# EAGLE board Schematic_Design_File (EAGLE 9.6.2)
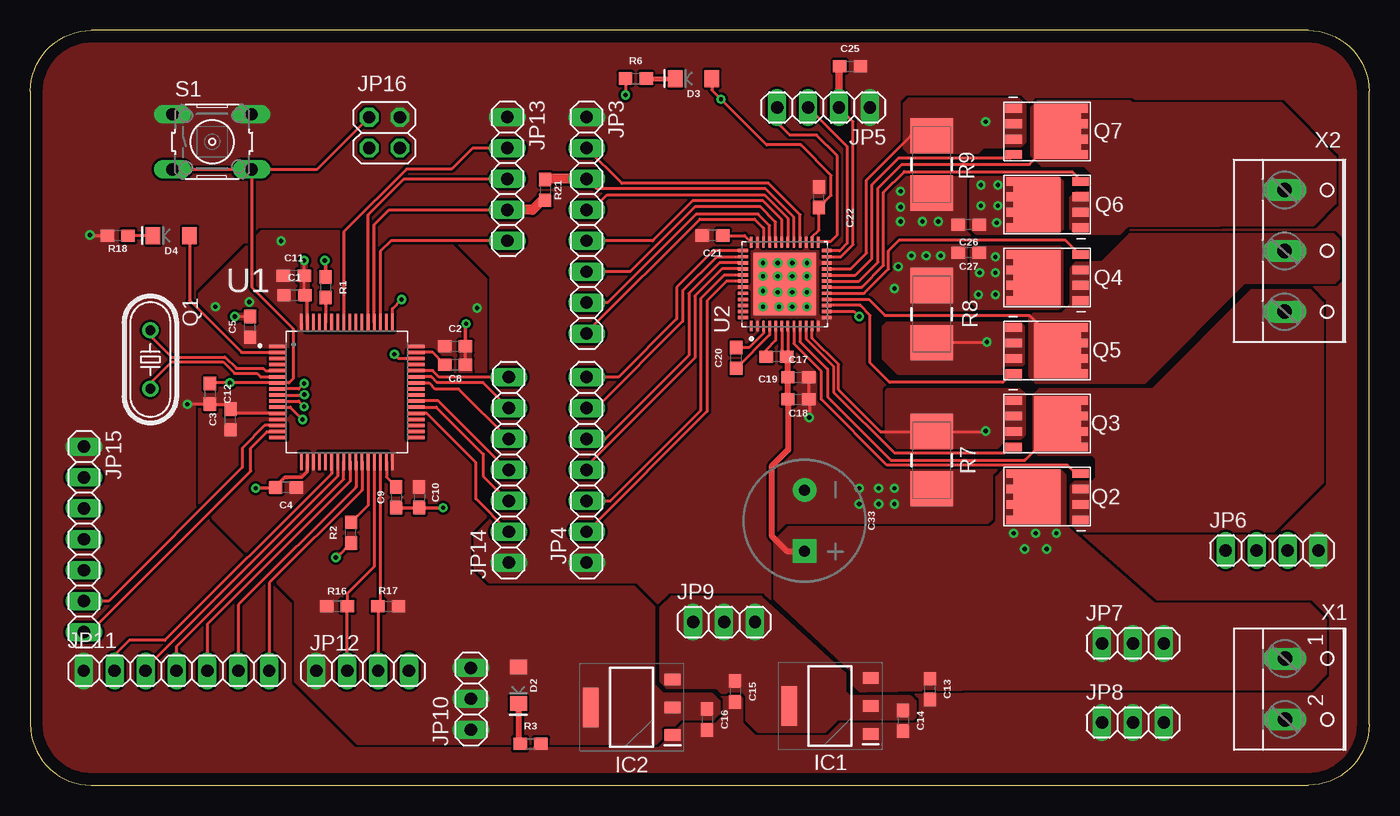
[diagram p0: board, top side]
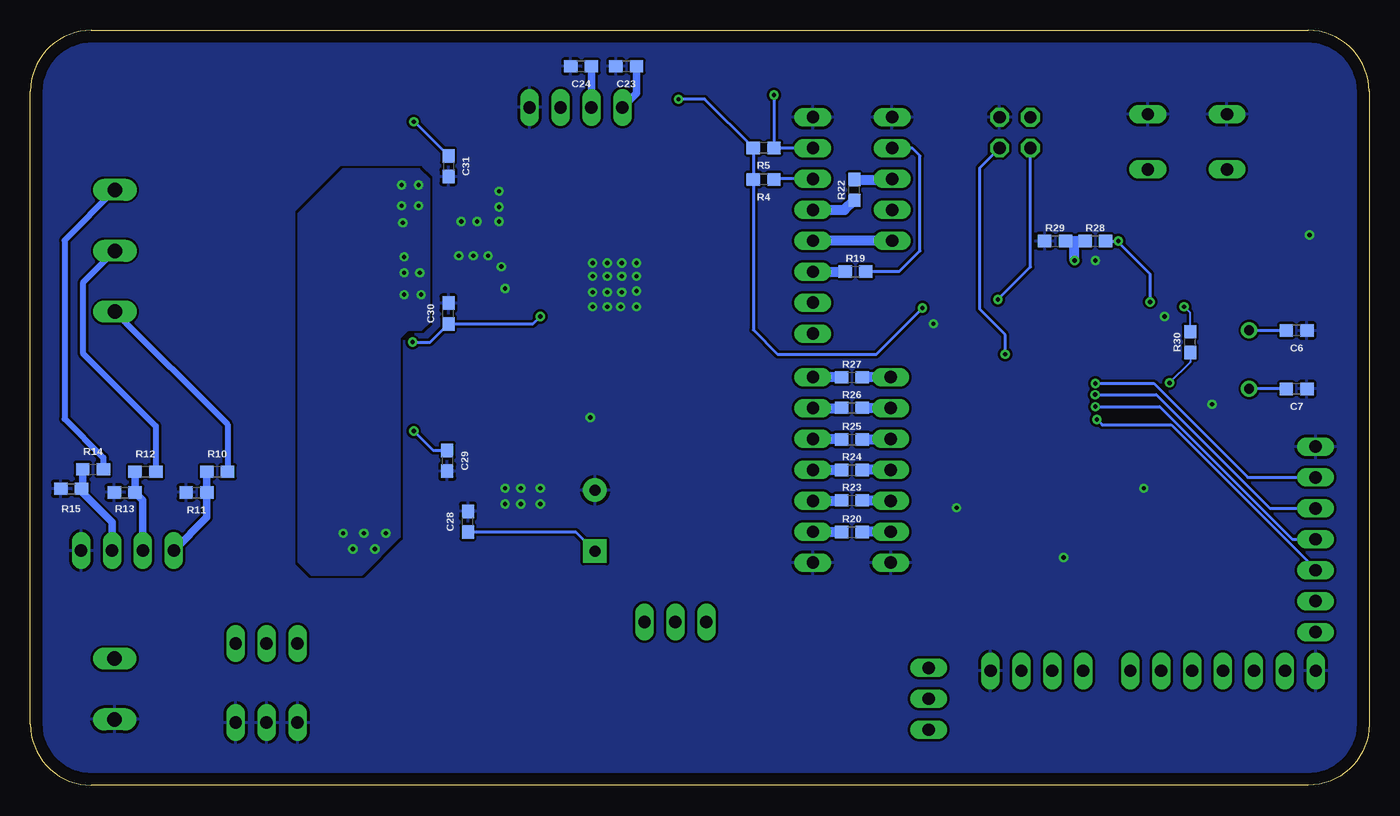
[diagram p1: board, bottom side, seen from below]

Size 110 x 62 mm. Coordinates in mm from the lower left corner, seen from the top.
Outline: 5,0 105,0 arc90 110,5 110,57 arc90 105,62 5,62 arc90 0,57 0,5 arc90 5,0
Copper layers (1*16): Top 0.035mm / dielectric 1.5mm / Bottom 0.035mm
Design rules "default *": minimum track width 6mil, minimum drill 0.35mm, track to track 6mil, track to pad 6mil, pad to pad 6mil, via to via 6mil, smd to smd 6mil, copper to edge 40mil, drill to drill 6mil, minimum pad ring 10mil, minimum via ring 8mil, stop-mask expansion 4mil, vias tented up to drill 0mil, thermal gap 10mil

## Footprints (pad centres in the part's own frame; a part is rotated, then mirrored left to right if it is on the bottom)
0603 = smd 1.1 x 1: 1 -0.85,0; 2 0.85,0
CPOL-RADIAL-5MM-10MM-NS = drill 0.9 pad 1.93 square: + 2.5,0 | drill 0.9 pad 1.93: - -2.5,0
LED-1206 = smd 1.2 x 1.4: A -1.5,0; C 1.5,0
SOT229P700X180-4N = smd 1.3 x 0.95: 1 -3.35,2.29; 2 -3.35,0; 3 -3.35,-2.29 | smd 1.3 x 3.25: 4 3.35,0
1X08 = drill 1.016 long: 1 -8.89,0; 2 -6.35,0; 3 -3.81,0; 4 -1.27,0; 5 1.27,0; 6 3.81,0; 7 6.35,0; 8 8.89,0
1X07 = drill 1.016 long: 1 -7.62,0; 2 -5.08,0; 3 -2.54,0; 4 0,0; 5 2.54,0; 6 5.08,0; 7 7.62,0
1X04 = drill 1.016 long: 1 -3.81,0; 2 -1.27,0; 3 1.27,0; 4 3.81,0
1X03 = drill 1.016 long: 1 -2.54,0; 2 0,0; 3 2.54,0
1X05 = drill 1.016 long: 1 -5.08,0; 2 -2.54,0; 3 0,0; 4 2.54,0; 5 5.08,0
2X02 = drill 1.016 octagon: 1 -1.27,-1.27; 2 -1.27,1.27; 3 1.27,-1.27; 4 1.27,1.27
HC49/S = drill 0.813: 1 -2.413,0; 2 2.413,0
CSD18540Q5BT = smd 1.372 x 0.71: 1 2.907,-1.905; 2 2.907,-0.635; 3 2.907,0.635; 4 2.907,1.905 | smd 0.59 x 0.71: 5 -2.907,1.905; 6 -2.907,0.635; 7 -2.907,-0.635; 8 -2.907,-1.905 | smd 3.85 x 4.52: 9 -0.687,0
WRIS_PSMC_2512_6.3X3.1X0.58X2.2(LXWXHXPW) = smd 2.9 x 3.5: 1 -2.35,0; 2 2.35,0
B3F-10XX = drill 1.016 long: 1 -3.251,2.261; 2 3.251,2.261; 3 -3.251,-2.261; 4 3.251,-2.261
QFP50P1200X1200X160-64N = smd 1.47 x 0.28: 1 -5.67,3.75; 2 -5.67,3.25; 3 -5.67,2.75; 4 -5.67,2.25; 5 -5.67,1.75; 6 -5.67,1.25; 7 -5.67,0.75; 8 -5.67,0.25; 9 -5.67,-0.25; 10 -5.67,-0.75; 11 -5.67,-1.25; 12 -5.67,-1.75; 13 -5.67,-2.25; 14 -5.67,-2.75; 15 -5.67,-3.25; 16 -5.67,-3.75; 33 5.67,-3.75; 34 5.67,-3.25; 35 5.67,-2.75; 36 5.67,-2.25; 37 5.67,-1.75; 38 5.67,-1.25; 39 5.67,-0.75; 40 5.67,-0.25; 41 5.67,0.25; 42 5.67,0.75; 43 5.67,1.25; 44 5.67,1.75; 45 5.67,2.25; 46 5.67,2.75; 47 5.67,3.25; 48 5.67,3.75 | smd 0.28 x 1.47: 17 -3.75,-5.67; 18 -3.25,-5.67; 19 -2.75,-5.67; 20 -2.25,-5.67; 21 -1.75,-5.67; 22 -1.25,-5.67; 23 -0.75,-5.67; 24 -0.25,-5.67; 25 0.25,-5.67; 26 0.75,-5.67; 27 1.25,-5.67; 28 1.75,-5.67; 29 2.25,-5.67; 30 2.75,-5.67; 31 3.25,-5.67; 32 3.75,-5.67; 49 3.75,5.67; 50 3.25,5.67; 51 2.75,5.67; 52 2.25,5.67; 53 1.75,5.67; 54 1.25,5.67; 55 0.75,5.67; 56 0.25,5.67; 57 -0.25,5.67; 58 -0.75,5.67; 59 -1.25,5.67; 60 -1.75,5.67; 61 -2.25,5.67; 62 -2.75,5.67; 63 -3.25,5.67; 64 -3.75,5.67
QFN50P700X700X100-49N = smd 0.86 x 0.26: 1 -3.435,2.75; 2 -3.435,2.25; 3 -3.435,1.75; 4 -3.435,1.25; 5 -3.435,0.75; 6 -3.435,0.25; 7 -3.435,-0.25; 8 -3.435,-0.75; 9 -3.435,-1.25; 10 -3.435,-1.75; 11 -3.435,-2.25; 12 -3.435,-2.75; 25 3.435,-2.75; 26 3.435,-2.25; 27 3.435,-1.75; 28 3.435,-1.25; 29 3.435,-0.75; 30 3.435,-0.25; 31 3.435,0.25; 32 3.435,0.75; 33 3.435,1.25; 34 3.435,1.75; 35 3.435,2.25; 36 3.435,2.75 | smd 0.26 x 0.86: 13 -2.75,-3.435; 14 -2.25,-3.435; 15 -1.75,-3.435; 16 -1.25,-3.435; 17 -0.75,-3.435; 18 -0.25,-3.435; 19 0.25,-3.435; 20 0.75,-3.435; 21 1.25,-3.435; 22 1.75,-3.435; 23 2.25,-3.435; 24 2.75,-3.435; 37 2.75,3.435; 38 2.25,3.435; 39 1.75,3.435; 40 1.25,3.435; 41 0.75,3.435; 42 0.25,3.435; 43 -0.25,3.435; 44 -0.75,3.435; 45 -1.25,3.435; 46 -1.75,3.435; 47 -2.25,3.435; 48 -2.75,3.435 | smd 5.15 x 5.15: 49 0,0
W237-102 = drill 1.194 long: 1 -2.5,-1.27; 2 2.5,-1.27
W237-103 = drill 1.194 long: 1 -5,-1.29; 2 0,-1.29; 3 5,-1.29

## Placement (x,y rotation side)
C1  10uf  [0603]  21.7,40.25 0 top
C2  0.1uf  [0603]  34.9,36.05 0 top
C3  0.1uf  [0603]  16.45,30.05 90 top
C4  0.1uf  [0603]  21,24.45 180 top
C5  0.1uf  [0603]  18.05,37.65 90 top
C6  [0603]  5.95,37.35 180 bottom
C7  [0603]  5.95,32.55 180 bottom
C8  0.1uf  [0603]  34.9,34.55 0 top
C9  0.1uf  [0603]  30.05,23.65 270 top
C10  0.1uf  [0603]  31.95,23.65 270 top
C11  0.1uf  [0603]  21.65,41.85 0 top
C12  0.1uf  [0603]  14.75,32.15 270 top
C13  0.1uf  [0603]  73.9,7.9 270 top
C14  0.1uf  [0603]  71.7,5.3 270 top
C15  0.1uf  [0603]  57.9,7.7 270 top
C16  0.1uf  [0603]  55.6,5.4 270 top
C17  4.7uf  [0603]  63.1,33.5 0 top
C18  0.1uf  [0603]  63.1,31.7 0 top
C19  1uf  [0603]  61.3,35.2 180 top
C20  47nf  [0603]  58,35.1 90 top
C21  1uf  [0603]  56.05,45.15 180 top
C22  0.1uf  [0603]  64.8,48.3 90 top
C23  2200pf  [0603]  61.05,59.05 180 bottom
C24  2200pf  [0603]  64.75,59.05 180 bottom
C25  2200pf  [0603]  67.35,59.05 0 top
C26  0.1uf  [0603]  77.1,46.05 180 top
C27  0.1uf  [0603]  77.1,43.75 180 top
C28  0.1uf  [0603]  74.05,21.65 90 bottom
C29  1000pf  [0603]  75.75,26.65 270 bottom
C30  1000pf  [0603]  75.65,38.75 90 bottom
C31  1000pf  [0603]  75.65,50.85 270 bottom
C33  220uf-25V  [CPOL-RADIAL-5MM-10MM-NS]  63.61,21.73 270 top
D2  [LED-1206]  40.1,8.2 270 top
D3  [LED-1206]  54.5,58.05 180 top
D4  [LED-1206]  11.58,45.15 180 top
IC1  AMS1117  [SOT229P700X180-4N]  65.7,6.5 180 top
IC2  AMS1117  [SOT229P700X180-4N]  49.4,6.4 180 top
JP3  [1X08]  45.7,45.99 270 top
JP4  [1X07]  45.7,25.9 90 top
JP5  [1X04]  65.17,55.67 180 top
JP6  [1X04]  102.03,19.28 0 top
JP7  [1X03]  90.6,11.65 0 top
JP8  [1X03]  90.6,5.15 0 top
JP9  [1X03]  57,13.4 0 top
JP10  [1X03]  36.2,7.1 90 top
JP11  [1X07]  12,9.4 0 top
JP12  [1X04]  27.3,9.4 0 top
JP13  [1X05]  39.2,49.8 270 top
JP14  [1X07]  39.3,25.9 90 top
JP15  [1X07]  4.4,20.2 270 top
JP16  [2X02]  29.1,53.6 90 top
Q1  [HC49/S]  9.86,34.97 270 top
Q2  CSD18510Q5B  [CSD18540Q5BT]  83.4,23.7 0 top
Q3  CSD18510Q5B  [CSD18540Q5BT]  83.7,29.7 180 top
Q4  CSD18510Q5B  [CSD18540Q5BT]  83.4,41.7 0 top
Q5  CSD18510Q5B  [CSD18540Q5BT]  83.7,35.7 180 top
Q6  CSD18510Q5B  [CSD18540Q5BT]  83.4,47.7 0 top
Q7  CSD18510Q5B  [CSD18540Q5BT]  83.7,53.7 180 top
R1  10k  [0603]  24.25,40.9 270 top
R2  10k  [0603]  26.35,20.75 90 top
R3  [0603]  41.1,3.4 0 top
R4  10k  [0603]  49.75,49.75 180 bottom
R5  10k  [0603]  49.75,52.35 180 bottom
R6  [0603]  49.75,58.05 0 top
R7  R050  [WRIS_PSMC_2512_6.3X3.1X0.58X2.2(LXWXHXPW)]  74.05,26.7 90 top
R8  R050  [WRIS_PSMC_2512_6.3X3.1X0.58X2.2(LXWXHXPW)]  74.05,38.7 270 top
R9  R050  [WRIS_PSMC_2512_6.3X3.1X0.58X2.2(LXWXHXPW)]  74.05,51 90 top
R10  [0603]  94.65,25.75 0 bottom
R11  [0603]  96.35,24.05 0 bottom
R12  [0603]  100.55,25.75 0 bottom
R13  [0603]  102.25,24.05 0 bottom
R14  [0603]  104.85,25.95 0 bottom
R15  [0603]  106.65,24.35 0 bottom
R16  10k  [0603]  25.2,14.7 180 top
R17  10k  [0603]  29.4,14.7 0 top
R18  [0603]  7.18,45.14 180 top
R19  [0603]  42.2,42.2 0 bottom
R20  [0603]  42.5,20.8 0 bottom
R21  [0603]  42.3,48.9 270 top
R22  [0603]  42.3,48.9 90 bottom
R23  [0603]  42.5,23.4 0 bottom
R24  [0603]  42.5,25.9 0 bottom
R25  [0603]  42.5,28.4 0 bottom
R26  [0603]  42.5,31 0 bottom
R27  [0603]  42.5,33.5 0 bottom
R28  [0603]  22.5,44.7 0 bottom
R29  [0603]  25.8,44.7 0 bottom
R30  10k  [0603]  14.7,36.4 90 bottom
S1  [B3F-10XX]  14.93,52.85 0 top
U1  STM32F405RGT6  [QFP50P1200X1200X160-64N]  26,32.3 0 top
U2  DRV8323RSRGZR  [QFN50P700X700X100-49N]  61.99,41.16 90 top
X1  [W237-102]  104.35,7.9 270 top
X2  [W237-103]  104.35,43.9 270 top

## Library data of the parts
C1-C31 C33 = SparkFun-Capacitors
D2-D4 = SparkFun-LED
IC1 IC2 = AMS1117; DESCRIPTION: 1117; HEIGHT: 1.8mm; MANUFACTURER_NAME: Advanced Monolithic Systems; MANUFACTURER_PART_NUMBER: AMS1117
JP3-JP16 = pinhead
Q1 = crystal; OC_FARNELL: 1667008; OC_NEWARK: unknown
Q2-Q7 = CSD18510Q5B; DESCRIPTION: MOSFET 40-V, N channel NexFET power MOSFET, single SON 5 mm x 6 mm, 0.96 mOhm 8-VSON-CLIP -55 to 150; HEIGHT: 1.05mm; MANUFACTURER_NAME: Texas Instruments; MANUFACTURER_PART_NUMBER: CSD18510Q5B; MOUSER_PART_NUMBER: 595-CSD18510Q5B; MOUSER_PRICE-STOCK: https://www.mouser.co.uk/ProductDetail/Texas-Instruments/CSD18510Q5B?qs=u4fy%2FsgLU9N21MPFguzayQ%3D%3D
R1-R6 R10-R30 = SparkFun-Resistors
R7-R9 = Wurth_Resistor_WRIS-PSMC; DATASHEET-URL: https://katalog.we-online.de/pbs/datasheet/580070763001.pdf; IR: 31.62A; MOUNT: SMT; PART-NUMBER: 580070763001; PRATED: 2W; TCR: ±100ppm/ °C; TECHNICAL-REFERENCE: MC2512R002F201KAATE0000
S1 = switch-omron; MPN: B3F-1000; OC_FARNELL: 176432; OC_NEWARK: 36M3542
U1 = STM32F405RGT6s; AVAILABILITY: In Stock; CHECK_PRICES: https://www.snapeda.com/parts/STM32F405RGT6/STMicroelectronics/view-part/?ref=eda; DESCRIPTION: ARM® Cortex®-M4 STM32F4 Microcontroller IC 32-Bit Single-Core 168MHz 1MB (1M x 8) FLASH 64-LQFP (10x10); MF: STMicroelectronics; MP: STM32F405RGT6; PACKAGE: LQFP-64 STMicroelectronics; PRICE: None; PURCHASE-URL: https://www.snapeda.com/api/url_track_click_mouser/?unipart_id=105502&manufacturer=STMicroelectronics&part_name=STM32F405RGT6&search_term=None; SNAPEDA_LINK: https://www.snapeda.com/parts/STM32F405RGT6/STMicroelectronics/view-part/?ref=snap
U2 = DRV8323RSRGZR; AVAILABILITY: In Stock; CHECK_PRICES: https://www.snapeda.com/parts/DRV8323RSRGZR/Texas+Instruments/view-part/?ref=eda; DESCRIPTION: 65-V max 3-phase smart gate driver with buck regulator & current shunt amplifiers; MF: Texas Instruments; MP: DRV8323RSRGZR; PACKAGE: VQFN-48 Texas Instruments; PRICE: None; PURCHASE-URL: https://www.snapeda.com/api/url_track_click_mouser/?unipart_id=784067&manufacturer=Texas Instruments&part_name=DRV8323RSRGZR&search_term=drv8323rs; SNAPEDA_LINK: https://www.snapeda.com/parts/DRV8323RSRGZR/Texas+Instruments/view-part/?ref=snap
X1 = con-wago-500; MPN: 237-102; OC_FARNELL: unknown; OC_NEWARK: 70K9898
X2 = con-wago-500; MPN: 237-103; OC_FARNELL: unknown; OC_NEWARK: 18M7116

## Nets
+3V3: C1.1 C2.1 C3.1 C4.1 C5.1 C10.1 C11.1 C16.1 C22.1 D2.A D3.A IC2.2 IC2.4 JP10.1 JP10.2 JP10.3 JP12.1 R4.2 R5.2 R16.2 R17.2 R28.2 R30.2 U1.1 U1.13 U1.19 U1.32 U1.48 U1.64 U2.26
+5V: C14.1 C15.1 IC1.2 IC1.4 IC2.3 JP9.1 JP9.2 JP9.3
+12V: C13.1 C17.1 C18.1 C19.1 C26.1 C27.1 C28.1 C33.+ IC1.3 JP7.1 JP7.2 JP7.3 Q2.5 Q2.6 Q2.7 Q2.8 Q2.9 Q4.5 Q4.6 Q4.7 Q4.8 Q4.9 Q6.5 Q6.6 Q6.7 Q6.8 Q6.9 U2.6 U2.7 X1.1
ADC_1: JP11.2 U1.22
ADC_2: JP11.3 U1.23
ADC_3: JP11.4 U1.24
ADC_4: JP11.5 U1.25
ADC_5: JP11.6 U1.26
ADC_6: JP11.7 U1.27
BOOT0: R1.2 U1.60
BOOT1: R2.2 U1.28
CAL: JP3.8 U2.34
CB: U2.44
CPH: C20.1 U2.4
CPL: C20.2 U2.3
CS: JP13.2 R19.2 U1.57
DAC_1: JP14.7 R27.2 U1.44
DAC_2: JP14.6 R26.2 U1.43
DAC_3: JP14.5 R25.2 U1.42
DAC_4: JP14.4 R24.2 U1.39
DAC_5: JP14.3 R23.2 U1.38
DAC_6: JP14.2 R20.2 U1.37
DVDD: C21.1 U2.36
ENABLE: JP3.7 U2.33
FAULT: JP3.2 R5.1 R6.1 U2.28
GHA: Q2.4 U2.8
GHB: Q4.4 U2.17
GHC: Q6.4 U2.18
GLA: Q3.4 U2.10
GLB: Q5.4 U2.15
GLC: Q7.4 U2.20
GND: C1.2 C2.2 C3.2 C4.2 C5.2 C6.1 C7.1 C8.2 C9.2 C10.2 C11.2 C12.2 C13.2 C14.2 C15.2 C16.2 C17.2 C18.2 C21.2 C22.2 C23.2 C24.2 C25.2 C26.2 C27.2 C28.2 C29.2 C30.2 C31.2 C33.- IC1.1 IC2.1 JP3.1 JP4.1 JP5.1 JP6.4 JP8.1 JP8.2 JP8.3 JP11.1 JP12.4 JP13.1 JP14.1 JP15.1 JP16.3 R2.1 R3.2 R7.1 R8.1 R9.1 R11.1 R13.1 R15.1 R18.2 R29.1 S1.1 S1.2 U1.12 U1.18 U1.63 U2.2 U2.12 U2.13 U2.22 U2.27 U2.35 U2.43 U2.49 X1.2
GPIO_1: JP15.2 U1.8
GPIO_2: JP15.3 U1.9
GPIO_3: JP15.4 U1.10
GPIO_4: JP15.5 U1.11
GPIO_5: JP15.6 U1.14
GPIO_6: JP15.7 U1.15
INHA: JP4.7 R27.1 U2.37
INHB: JP4.5 R25.1 U2.39
INHC: JP4.3 R23.1 U2.41
INLA: JP4.6 R26.1 U2.38
INLB: JP4.4 R24.1 U2.40
INLC: JP4.2 R20.1 U2.42
LED: D4.A U1.2
MISO: JP13.4 R21.2 U1.52
MOSI: JP13.3 R22.2 U1.53
N$1: D2.C R3.1
N$2: D4.C R18.1
N$3: R1.1 R28.1 R29.2
N$15: D3.C R6.2
NRST: C12.1 JP16.4 R30.1 S1.3 S1.4 U1.7
OSC_N: C7.2 Q1.2 U1.6
OSC_P: C6.2 Q1.1 U1.5
SCL: JP12.2 R16.1 U1.29
SCLK: JP3.5 JP13.5 U1.51 U2.31
SCS: JP3.6 R19.1 U2.32
SDA: JP12.3 R17.1 U1.30
SDI: JP3.4 R22.1 U2.30
SDO: JP3.3 R4.1 R21.1 U2.29
SHA: Q2.1 Q2.2 Q2.3 Q3.5 Q3.6 Q3.7 Q3.8 Q3.9 R10.2 U2.9 X2.3
SHB: Q4.1 Q4.2 Q4.3 Q5.5 Q5.6 Q5.7 Q5.8 Q5.9 R12.2 U2.16 X2.2
SHC: Q6.1 Q6.2 Q6.3 Q7.5 Q7.6 Q7.7 Q7.8 Q7.9 R14.2 U2.19 X2.1
SOA: C23.1 JP5.4 U2.25
SOB: C24.1 JP5.3 U2.24
SOC: C25.1 JP5.2 U2.23
SPA: C29.1 Q3.1 Q3.2 Q3.3 R7.2 U2.11
SPB: C30.1 Q5.1 Q5.2 Q5.3 R8.2 U2.14
SPC: C31.1 Q7.1 Q7.2 Q7.3 R9.2 U2.21
SWCLK: JP16.2 U1.49
SWDIO: JP16.1 U1.46
VCAP_1: C9.1 U1.31
VCAP_2: C8.1 U1.47
VCP: C19.2 U2.5
VIN: U2.47
VSENA: JP6.1 R10.1 R11.2
VSENB: JP6.2 R12.1 R13.2
VSENC: JP6.3 R14.1 R15.2

## Tracks (layer width: path | path; a pad name or v marks a point on that pad's centre or on a via)
+3V3  (via drill 0.35)
  Top 0.254: U2.26 64.24,45.04 64.8,45.6 C22.1 65.8,48.45 65.8,50.1 63.3,52.6 60.5,52.6 v56.75,56.35 56,57.1 D3.A
  Bottom 0.152: R30.2 14.7,38.8 v15.2,39.3
  Bottom 0.254: v56.75,56.35 54.6,56.35 R5.2 R4.2 50.6,37.4 48.6,35.4 40.5,35.4 v36.7,39.2 | R28.2 v20.6,44.7 20.6,44.6 18,42 v18,39.7
  pour Top (isolate 0.203, rank 2, no thermals): 49.6,16.3 51.21,14.69 51.21,8.29 52,7.5 56,7.5 56.6,6.9 56.6,5.9 56.1,5.4 53.4,5.4 51.4,3.4 26.9,3.4 21.8,8.5 21.8,15.1 13.9,23 13.9,40.4 19,45.5 33.5,45.5 37.4,41.6 37.4,22 36.1,20.7 36.1,17.7 37.5,16.3
+5V
  pour Top (isolate 0.203, rank 2, no thermals): 72.7,6.9 72.7,5.6 72.5,5.4 66.3,5.4 65.3,4.4 59.8,4.4 58.9,5.3 58.9,7.3 58.6,7.6 56.8,7.6 56.4,8 52.3,8 51.8,8.5 51.8,14.6 52.7,15.5 60,15.5 66.9,9.2 66.9,7.7 67.3,7.3 72.3,7.3
+12V  (via drill 0.35)
  Top 0.254: Q6.7 81.13,47.7 Q6.9 | Q4.6 82.08,42.34 Q4.9 | U2.7 62.24,35.29 | 62.24,35.29 C19.1 | U2.6 61.74,35.79 62.24,35.29
  Top 0.508: C33.+ 62.17,19.23 60.9,20.5 60.9,26.2 62.25,27.55 C18.1 C17.1 62.25,35.1 C19.1
  Bottom 0.254: C33.+ 65.18,20.8 C28.1
  other vias: 84.3,20.7 82.6,20.7 80.8,20.7 83.5,19.4 81.7,19.4 79.5,47.6 79.4,46.2 78.1,49.3 78.1,47.6 79.3,42.1 79.3,43.4 77.9,40.3 79.3,40.3 78,42.1 79.5,49.3
  pour Top (isolate 0.203, rank 2, no thermals): 77.6,50 84.4,50 84.8,49.6 84.8,45.7 84.4,45.3 77.7,45.3 77.3,45.7 77.3,49.7
  pour Top (isolate 0.203, rank 2, no thermals): 84.6,44.2 77.5,44.2 77.3,44 77.3,39.7 77.8,39.2 84.5,39.2 84.8,39.5 84.8,44
  pour Top (isolate 0.203, rank 2, no thermals): 106.4,13.6 106.4,9.1 105.19,7.89 79.21,7.89 68.67,7.72 68.17,7.72 67.6,8.3 67.6,9.29 61.2,15.29 61.2,20.1 62.3,21.2 78.9,21.2 79.4,21.7 79.4,25.3 80,25.9 84.6,25.9 85,25.5 85,21.3 92.31,14.9 105.1,14.9
  pour Bottom (isolate 0.203, no thermals): 79.7,36.7 79.7,20.4 82.8,17.3 86.9,17.3 87.9,18.3 87.9,47 84.3,50.6 78.1,50.6 77.3,49.8 77.3,38 77.9,37.4 79,37.4
ADC_1
  Top 0.254: U1.22 24.75,25.61 11.04,11.9 8.1,11.9 6.92,10.72 JP11.2
ADC_2
  Top 0.254: U1.23 25.25,25.38 9.46,9.59 JP11.3
ADC_3
  Top 0.254: JP11.4 12,11.4 25.75,25.15 U1.24
ADC_4
  Top 0.254: U1.25 26.25,24.95 14.54,13.24 JP11.5
ADC_5
  Top 0.254: U1.26 26.75,24.48 17.08,14.81 JP11.6
ADC_6
  Top 0.254: U1.27 27.25,24.25 19.62,16.62 JP11.7
BOOT0
  Top 0.254: R1.2 U1.60
BOOT1
  Top 0.254: U1.28 27.75,23 R2.2
CAL
  Top 0.254: U2.34 60.24,45.76 59.5,46.5 55,46.5 45.7,37.2 JP3.8
CPH
  Top 0.254: C20.1 60.74,36.99 U2.4
CPL
  Top 0.254: U2.3 60.24,37.14 59.05,35.95 C20.2
CS
  Top 0.254: JP13.2 36.34,52.34 34.6,50.6 30.9,50.6 25.75,45.45 U1.57
  Bottom 0.254: R19.2 38.6,42.2 36.9,43.9 36.9,51.7 37.54,52.34 JP13.2
DAC_1
  Top 0.254: JP14.7 33.58,33.52 33.05,34.05 U1.44
  Bottom 0.813: JP14.7 41.63,33.52 R27.2
DAC_2
  Top 0.254: JP14.6 37.2,33.08 33.42,33.08 32.95,33.55 U1.43
  Bottom 0.813: R26.2 39.32,31 JP14.6
DAC_3
  Top 0.254: U1.42 32.75,33.05 33.26,32.54 35.2,32.54 JP14.5
  Bottom 0.813: R25.2 39.34,28.4 JP14.5
DAC_4
  Top 0.254: U1.39 31.69,31.57 33.5,31.57 39.17,25.9 JP14.4
  Bottom 0.813: JP14.4 R24.2
DAC_5
  Top 0.254: U1.38 33.35,31.05 37.2,27.2 37.2,25.4 39.24,23.36 JP14.3
  Bottom 0.813: R23.2 39.34,23.4 JP14.3
DAC_6
  Top 0.254: JP14.2 36.6,23.52 36.6,26.5 32.55,30.55 U1.37
  Bottom 0.813: JP14.2 41.63,20.82 R20.2
DVDD
  Top 0.254: C21.1 58.69,45.15 U2.36
ENABLE
  Top 0.254: U2.33 60.74,45.96 59.79,46.91 54.71,46.91 47.44,39.64 JP3.7
FAULT  (via drill 0.35)
  Top 0.254: U2.28 63.24,46.86 60.66,49.44 48.6,49.44 JP3.2 | R6.1 v48.9,56.7
  Bottom 0.254: JP3.2 R5.1 v48.9,56.7
GHA
  Top 0.254: U2.8 62.74,37.52 62.73,37.52 62.73,36.27 65,34 65,31.7 70.4,26.3 85.21,26.3 85.91,25.61 Q2.4
GHB
  Top 0.254: Q4.4 86.19,43.6 85,44.8 71.41,44.8 70.51,43.9 70.51,42.41 68.51,40.41 U2.17
GHC
  Top 0.254: Q6.4 86.3,49.62 86.3,49.7 85.6,50.4 71.8,50.4 70.1,48.7 70.1,42.7 68.31,40.91 U2.18
GLA
  Top 0.254: U2.10 63.73,36.67 66,34.4 66,32.3 71,27.3 80,27.3 80.49,27.8 Q3.4
GLB
  Top 0.254: U2.15 68.19,39.41 69,38.6 69,34.7 70.61,33.09 79.89,33.09 80.59,33.8 Q5.4
GLC
  Top 0.254: Q7.4 80.5,51.5 71.33,51.5 69.14,49.32 69.14,43.24 67.81,41.91 U2.20
GND  (via drill 0.35)
  Top 0.254: 20.15,24.55 C4.2 20.1,24.4 v18.5,24.4 | R2.1 25.15,18.7 v25.1,18.7 | C9.2 C10.2 v33.9,22.8 | C8.2 C2.2 35.75,37.85 v35.8,37.9 | U1.63 22.75,40.05 C1.2 22.5,40.3 C11.2 v22.5,43.1 | C5.2 v16.8,38.5 | v63.81,42.91 v63.8,42.9 | C17.2 C18.2 64,31.65 v64,30.2 | v12.9,31.3 C12.2 16.05,31.3 C3.2 16.8,30.55 U1.12
  Top 0.305: R18.2 4.96,45.14 v4.9,45.2 | U1.18 22.75,25.75 22.3,25.3 20.9,25.3 20.15,24.55
  other vias: 74.6,46.3 73.3,46.3 71.5,46.3 71.5,47.5 71.5,48.8 74.8,43.5 73.6,43.5 72.4,43.5 71,40.8 71.3,42.6 71,23.1 71,24.4 69.7,24.4 69.7,23.1 68.1,23.1 68.1,24.4 62.6,42.9 61.4,42.9 60.2,42.9 63.8,41.8 63.8,40.5 63.8,39.3 62.6,41.8 62.6,40.5 62.6,39.3 61.4,41.8 60.2,41.8 60.2,40.6 61.4,40.5 61.5,39.3 60.2,39.3
  pour Top (isolate 0.203, rank 2, no thermals): 78.8,25.3 78.8,22.2 78.6,22 62.3,22 62,22.3 62,25.8 62.4,26.2 69.9,26.2 70.4,25.7 78.4,25.7
  pour Top (isolate 0.203, rank 2, no thermals): 76.8,45.6 76.8,49.7 76.5,50 72,50 70.5,48.5 70.5,45.7 70.9,45.3 76.5,45.3
  pour Top (isolate 0.203, rank 2, no thermals): 76.8,39.8 76.8,44.1 76.6,44.3 71.2,44.3 70.9,44 70.9,42.2 70.1,41.4 70.1,39.4 70.4,39.1 76.1,39.1
  pour Bottom (isolate 0.203, rank 6): -2,67 -2,-3 118,-3 123,-3 123,67 123,70 5,70 -2,70
  pour Top (isolate 0.203, rank 6, no thermals): -10.9,61 -10.9,2.4 0.1,-8.6 109.3,-8.6 124.1,6.2 124.1,51.2 104.3,71 -1,71 -10.9,61.1
GPIO_1  (via drill 0.35)
  Top 0.254: v22.5,33 22.05,32.55 U1.8
  Bottom 0.254: JP15.2 9.98,25.28 17.7,33 v22.5,33
GPIO_2  (via drill 0.35)
  Top 0.254: U1.9 22.48,32.05 v22.52,32.09
  Bottom 0.254: JP15.3 8.14,22.74 17.48,32.09 v22.52,32.09
GPIO_3  (via drill 0.35)
  Top 0.254: U1.10 22.05,31.55 v22.5,31.1
  Bottom 0.254: JP15.4 6.3,20.2 17.2,31.1 v22.5,31.1
GPIO_4  (via drill 0.35)
  Top 0.254: U1.11 21.35,31.05 v22.36,30.04
  Bottom 0.254: v22.36,30.04 21.92,29.59 16.27,29.59 4.4,17.73 JP15.5
GPIO_5
  Top 0.254: JP15.6 6.42,15.12 17.4,26.1 17.4,27.7 19.25,29.55 U1.14
GPIO_6
  Top 0.254: JP15.7 4.88,12.58 18.1,25.8 18.1,27.7 19.45,29.05 U1.15
INHA
  Top 0.254: U2.37 56.1,43.9 53.1,40.9 53.1,38.3 48.32,33.52 JP4.7
  Bottom 0.813: R27.1 45.68,33.5 JP4.7
INHB
  Top 0.254: U2.39 56.61,42.91 54.1,40.4 54.1,35.3 47.24,28.44 JP4.5
  Bottom 0.813: JP4.5 43.39,28.44 R25.1
INHC
  Top 0.254: U2.41 57.01,41.91 55.1,40 55.1,30.8 47.66,23.36 JP4.3
  Bottom 0.813: JP4.3 43.39,23.36 R23.1
INLA
  Top 0.254: U2.38 56.41,43.41 53.6,40.6 53.6,38.1 46.48,30.98 JP4.6
  Bottom 0.813: JP4.6 43.37,30.98 R26.1
INLB
  Top 0.254: U2.40 56.81,42.41 54.6,40.2 54.6,35.1 45.7,26.2 JP4.4
  Bottom 0.813: JP4.4 R24.1
INLC
  Top 0.254: U2.42 57.21,41.41 55.6,39.8 55.6,30.7 45.72,20.82 JP4.2
  Bottom 0.813: JP4.2 43.37,20.82 R20.1
LED
  Top 0.254: D4.A 13.08,39.82 17.35,35.55 U1.2
MISO
  Top 0.254: U1.52 28.25,46.05 29.46,47.26 JP13.4
  Top 0.813: R21.2 42.05,48.05 41.26,47.26 JP13.4
MOSI
  Top 0.254: U1.53 27.75,46.85 30.7,49.8 JP13.3
  Bottom 0.813: R22.2 39.25,49.75 JP13.3
N$1
  Top 0.508: D2.C 40.1,3.55 R3.1
N$2
  Top 0.254: D4.C R18.1
N$3  (via drill 0.35)
  Top 0.305: R1.1 24.25,43.05 v24.2,43.1
  Bottom 0.813: R28.1 24.2,44.7 | 24.2,44.7 R29.2 | v24.2,43.1 24.2,44.7
N$15
  Top 0.406: R6.2 D3.C
NRST  (via drill 0.35)
  Top 0.254: S1.3 S1.4 | S1.4 18.18,40.91 21.6,37.49 21.6,33.4 21.25,33.05 U1.7 v16.4,33.05 14.8,33.05 C12.1 | S1.4 23.55,50.59 JP16.4
  Bottom 0.152: R30.1 14.7,34.75 v16.4,33.05
OSC_N
  Top 0.254: Q1.2 9.86,33.03 11.6,34.77 15.83,34.77 16.77,33.83 18.63,33.83 18.91,33.55 U1.6
  Bottom 0.254: C7.2 Q1.2
OSC_P
  Top 0.254: Q1.1 9.86,36.91 11.6,35.17 16,35.17 16.94,34.23 19.14,34.23 19.32,34.05 U1.5
  Bottom 0.254: C6.2 9.83,37.35 Q1.1
SCL
  Top 0.254: JP12.2 26.03,14.68 | 26.03,14.68 R16.1 | U1.29 28.25,17.95 26.03,15.73 26.03,14.68
SCLK
  Top 0.254: U2.31 61.74,46.46 60.2,48 54.4,48 51.12,44.72 JP3.5 | JP13.5 29.62,44.72 28.75,43.85 U1.51
  Bottom 0.813: JP13.5 JP3.5
SCS
  Top 0.254: U2.32 61.24,46.26 60,47.5 54.6,47.5 49.28,42.18 JP3.6
  Bottom 0.813: JP3.6 43.07,42.18 R19.1
SDA
  Top 0.254: JP12.3 28.55,9.42 R17.1 28.75,14.9 U1.30
SDI
  Top 0.254: JP3.4 46.16,47.26 47.4,48.5 60.3,48.5 62.24,46.56 U2.30
  Bottom 0.813: JP3.4 43.09,47.26 R22.1
SDO
  Top 0.254: U2.29 62.74,46.66 60.4,49 46.5,49 JP3.3
  Top 0.813: JP3.3 42.35,49.8 R21.1
  Bottom 0.254: JP3.3 48.85,49.8 R4.1
SHA
  Top 0.254: U2.9 63.23,36.44 65.5,34.17 65.5,31.9 70.69,26.71 81.7,26.71 84.39,29.39 Q3.9
  Bottom 0.508: X2.3 93.8,29.64 R10.2
  pour Top (isolate 0.203, rank 2, no thermals): 85.8,24.9 85.5,24.6 85.5,21.5 86.1,20.9 102.2,20.9 106.2,24.9 106.2,39.6 105.2,40.6 100.3,40.6 92.2,32.5 82.9,32.5 82.4,32 82.4,27.6 82.8,27.2 87.2,27.2 87.6,26.8 87.6,25.2 87.3,24.9
SHB
  Top 0.254: Q5.9 84.39,36.3 82.09,38.6 70.2,38.6 68.89,39.91 U2.16
  Bottom 0.508: X2.2 105.7,41.26 105.7,35.5 99.7,29.5 R12.2
  pour Top (isolate 0.203, rank 2, no thermals): 82.1,38.4 82.1,33.6 82.6,33.1 91.6,33.1 99.8,41.3 107.2,41.3 107.5,41.6 107.5,44.8 107.1,45.2 90.3,45.2 88,42.9 85.9,42.9 85.5,42.5 85.5,39.5 84.7,38.7 82.4,38.7
SHC
  Top 0.254: U2.19 68.1,41.41 69.65,42.96 69.65,49.05 71.6,51 82.1,51 84.39,53.29 Q7.9
  Bottom 0.508: X2.1 107.2,44.76 107.2,30.1 104,26.9 R14.2
  pour Top (isolate 0.203, rank 2, no thermals): 82.3,55.7 82.8,56.2 90.3,56.2 90.5,56 102.8,56 107.2,51.6 107.2,47.8 105.4,46 90.1,45.9 89.5,45.3 85.9,45.3 85.5,45.7 85.5,48.3 85.9,48.7 87.1,48.7 87.3,48.9 87.3,50.2 86.6,50.9 83.1,50.9 82.3,51.7
SOA
  Top 0.254: U2.25 64.84,44.7 65.8,44.7 66.3,45.2 66.3,51.7 64.6,53.4 62.4,53.4 61.36,54.44 JP5.4
  Bottom 0.61: C23.1 60.2,56.83 JP5.4
SOB
  Top 0.254: JP5.3 67.1,52.47 67.1,44.5 66.5,43.9 65.44,43.9 U2.24
  Bottom 0.61: C24.1 JP5.3
SOC
  Top 0.254: U2.23 66.61,43.41 67.6,44.4 67.6,54.51 JP5.2
  Top 0.61: JP5.2 66.44,58.99 C25.1
SPA  (via drill 0.35)
  Top 0.254: v78.5,29.1 78.45,29.05 R7.2 69.86,29.05 66.41,32.5 66.41,34.57 64.24,36.73 U2.11
  Bottom 0.254: v78.5,29.1 76.9,27.5 C29.1
  pour Top (isolate 0.203, rank 2, no thermals): 81.7,28.8 81.7,32.1 81.3,32.5 70.4,32.5 70.3,32.4 70.3,28.6 71.2,27.7 79.4,27.7 80,28.3 81.2,28.3
SPB  (via drill 0.35)
  Top 0.254: R8.2 75.75,36.4 v78.6,36.4 | v68.1,38.5 v68.1,38.51 67.7,38.91 U2.14
  Bottom 0.254: v78.6,36.4 77.15,36.4 C30.1 68.7,37.9 v68.1,38.5
  pour Top (isolate 0.203, rank 2, no thermals): 80.8,33.8 71.3,33.8 70.1,35 70.1,37.7 70.4,38 81.3,38 81.6,37.7 81.6,34.6
SPC  (via drill 0.35)
  Top 0.254: R9.2 72.35,53.35 68.7,49.7 68.7,43.7 67.41,42.41 U2.21
  Bottom 0.254: v78.5,54.5 78.45,54.5 C31.1
  pour Top (isolate 0.203, rank 2, no thermals): 81.3,52.4 78.3,52.4 77.8,51.9 72.2,51.9 71.8,52.3 71.8,56 72.2,56.4 81.2,56.4 81.7,55.9 81.7,52.8
SWCLK  (via drill 0.35)
  Top 0.254: U1.49 29.75,39.15 v30.5,39.9
  Bottom 0.254: v30.5,39.9 27.83,42.57 JP16.2
SWDIO  (via drill 0.35)
  Top 0.254: U1.46 30.25,35.05 v29.9,35.4
  Bottom 0.254: v29.9,35.4 29.9,37 32,39.1 32,50.7 JP16.1
VCAP_1
  Top 0.254: U1.31 29.25,25.3 C9.1
VCAP_2
  Top 0.254: C8.1 33.05,35.55 U1.47
VCP
  Top 0.254: U2.5 61.24,36.54 60.45,35.75 C19.2
VSENA
  Bottom 0.61: R10.1 R11.2 95.5,22 JP6.1
VSENB
  Bottom 0.61: R12.1 R13.2 100.76,23.41 JP6.2
VSENC
  Bottom 0.61: JP6.3 103.3,21.6 105.8,24.1 R15.2 105.7,24.45 R14.1